# Altium PCB esp_altimeter_evo2.PcbDoc
Units mm, origin at the board's own origin, x right, y up, seen from the top; angles counter-clockwise.
Board outline 19 x 28 mm, 2 copper layers (Top Layer, Bottom Layer); 32 components, 22 nets, 98 pads, 20 vias.
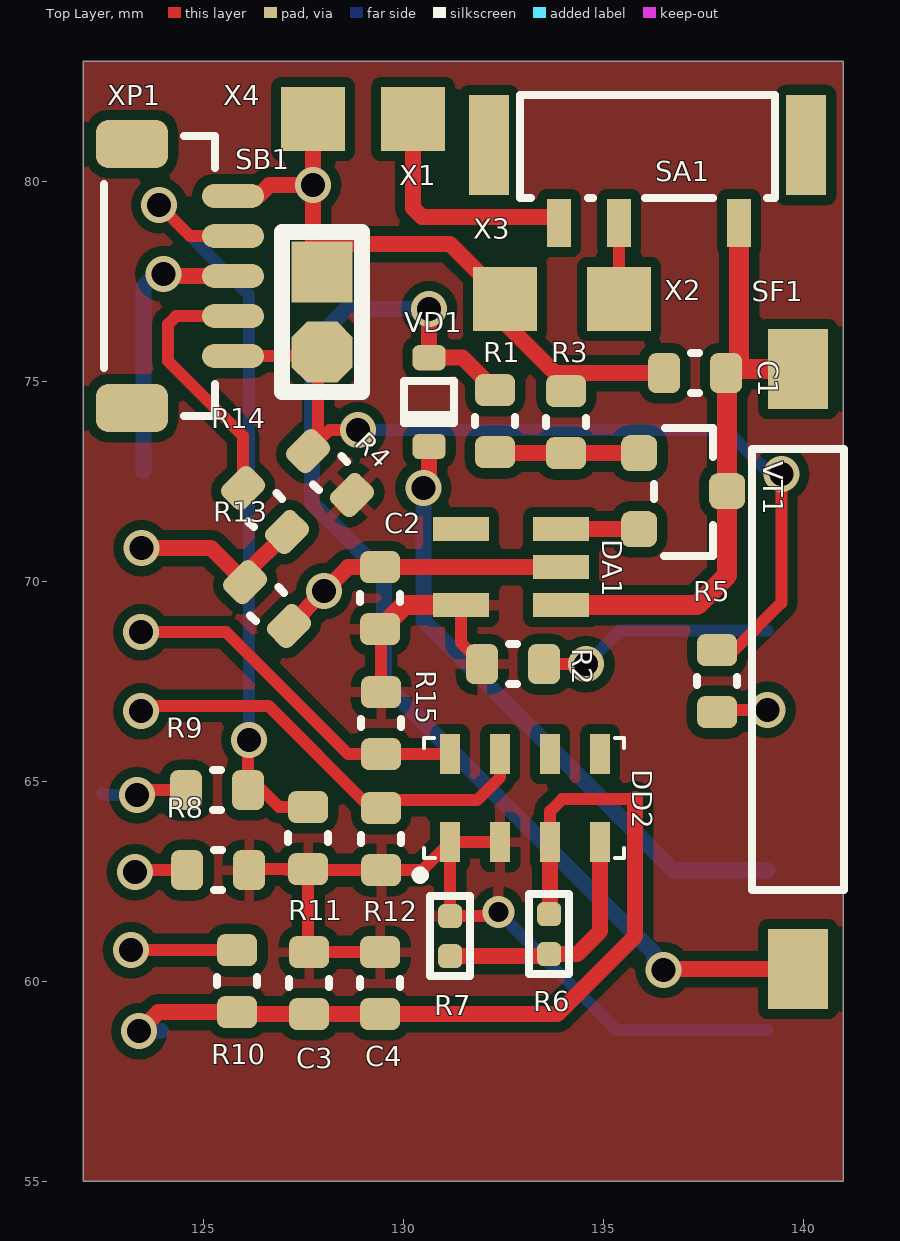
[diagram p0: Top Layer view]
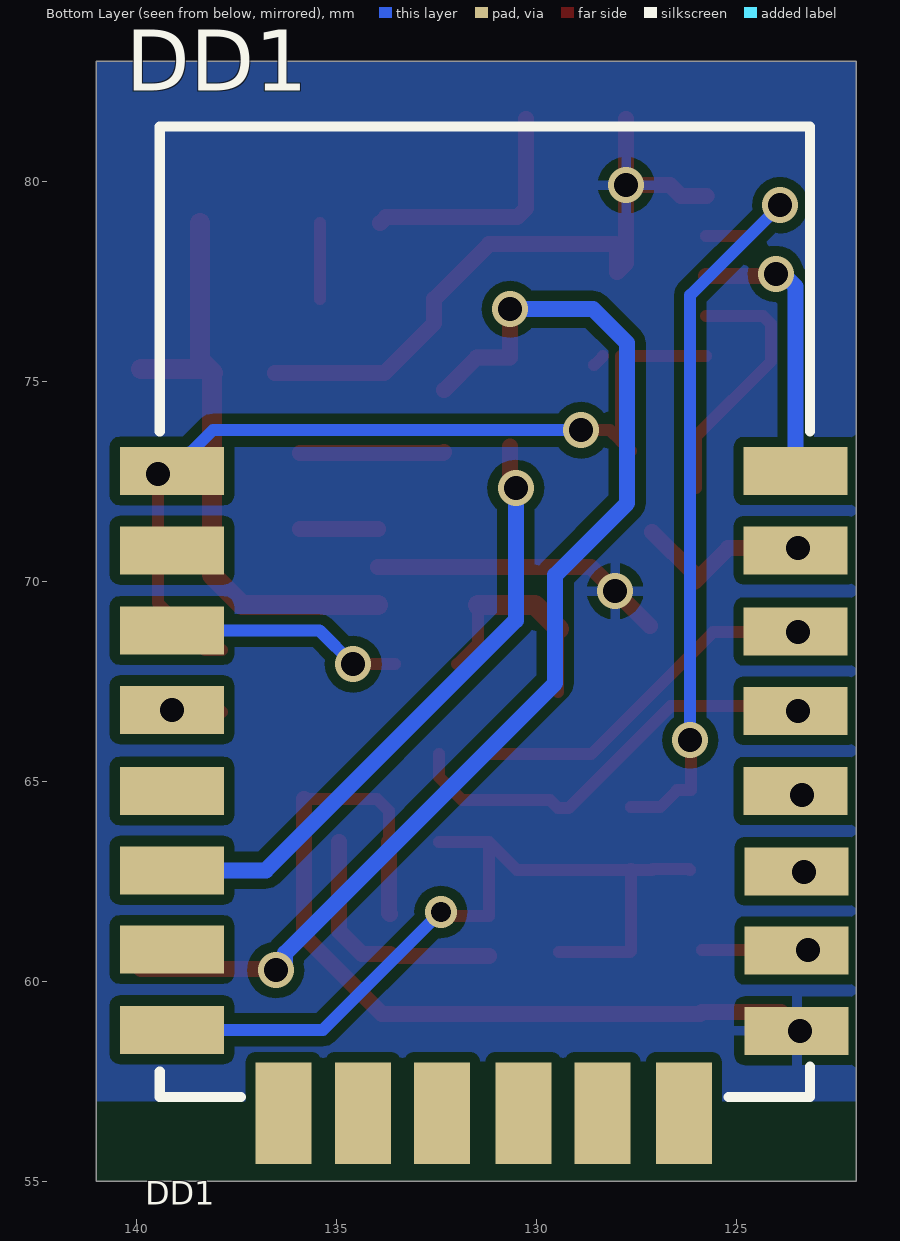
[diagram p1: Bottom Layer view, seen from below]
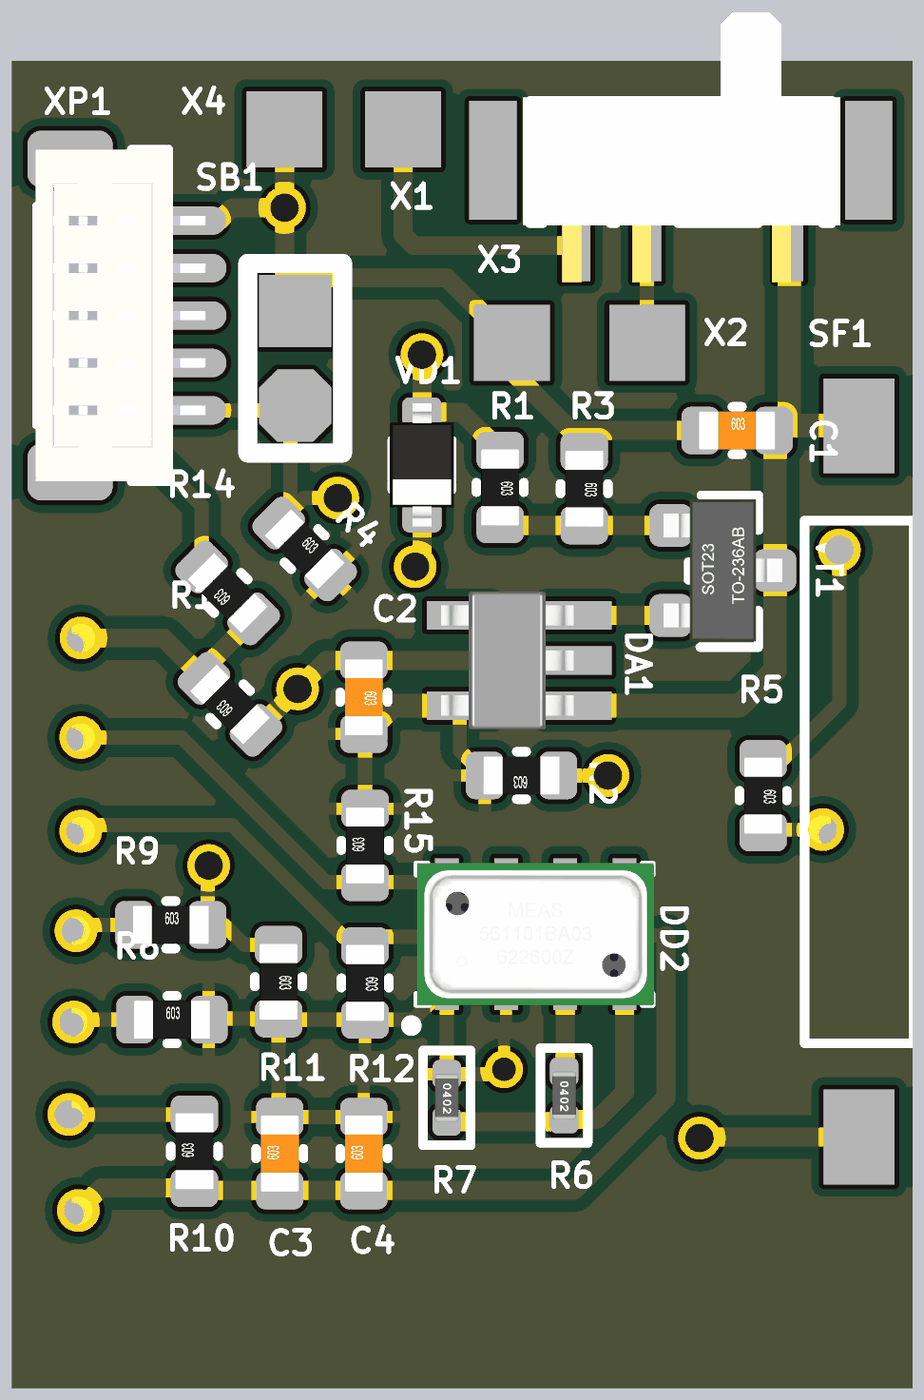
[diagram p2: 3D render of the assembled board from above, using the file's embedded part models]

## Layer stack, top to bottom
Top Solder: solder mask 0.0102, Solder Resist, Dk 3.5
Top Layer: signal copper 0.0356
Dielectric 1: dielectric 0.32, FR-4, Dk 4.8
Bottom Layer: signal copper 0.0356
Bottom Solder: solder mask 0.0102, Solder Resist, Dk 3.5

## Board outline
122,55 122,83 141,83 141,55

## Design rules (kind name [scope] priority, off if disabled: settings)
Clearance [All] p1: gap=0.254 ignorepadtopadclearanceinfootprint=FALSE except(0: Arc-Hole Track-Hole SMDPad-Hole THPad-Hole Via-Hole Fill-Hole Poly-Hole Region-Hole Text-Hole)
PolygonConnect [All] p1: connectstyle=Relief reliefconductorwidth=0.254 reliefentries=4 polygonreliefangle="90 Angle" airgapwidth=0.254
RoutingVias [All] p1: holewidth=0.6 width=0.9 viastyle="Through Hole" minholewidth=0.3 minwidth=0.6 maxholewidth=1.5 maxwidth=2.5
SolderMaskExpansion [All] p1: expansion=0.102
Width [All] p1: maxlimit=2.54 minlimit=0.254 preferedwidth=0.5
30 further rules are at their usual default settings.

## Components (designator, comment, footprint, x,y, rotation, side; value= is the part's Value field where it differs from the comment)
C1 "Cap EIA 0603" "CAP EIA 0603" 137.3,75.2 r0 top value=1uF
C2 "Cap EIA 0603" "CAP EIA 0603" 129.425,69.575 r270 top value=1uF
C3 "Cap EIA 0603" "CAP EIA 0603" 127.65,59.95 r90 top value=0.1uF
C4 "Cap EIA 0603" "CAP EIA 0603" 129.425,59.95 r90 top value=100nF
DA1 "LD39015" SOT23-5L 132.45,70.35 r270 top
DD1 "ESP8266 ESP-12E-RU" "ESP8266 ESP-12-E" 122.52,56.344 r180 bottom
DD2 "MS5611" MS5611 133.025,64.575 r90 top
R1 "Res EIA 0603" "RES EIA 0603" 132.3,74 r270 top value=1k
R2 "Res EIA 0603" "RES EIA 0603" 132.75,67.925 r180 top value=10k
R3 "Res EIA 0603" "RES EIA 0603" 134.075,73.975 r270 top value=10k
R4 "Res EIA 0603" "RES EIA 0603" 128.175,72.7 r315 top value=10k
R5 "Res EIA 0603" "RES EIA 0603" 137.85,67.5 r270 top value=470
R6 "Res EIA 0402" "RES EIA 0402" 133.65,61.175 r270 top value=0
R7 "Res EIA 0402" "RES EIA 0402" 131.175,61.125 r270 top value=0
R8 "Res EIA 0603" "RES EIA 0603" 125.375,62.775 r0 top value=10k
R9 "Res EIA 0603" "RES EIA 0603" 125.35,64.775 r0 top value=10k
R10 "Res EIA 0603" "RES EIA 0603" 125.85,60 r90 top value=10k
R11 "Res EIA 0603" "RES EIA 0603" 127.625,63.575 r270 top value=10k
R12 "Res EIA 0603" "RES EIA 0603" 129.45,63.55 r270 top value=10k
R13 "Res EIA 0603" "RES EIA 0603" 126.6,69.425 r135 top value=22k
R14 "Res EIA 0603" "RES EIA 0603" 126.55,71.775 r135 top value=10k
R15 "Res EIA 0603" "RES EIA 0603" 129.45,66.45 r90 top value=10k
SA1 "IS-1290" IS-1290F 136.175,80.85 r180 top
SB1 "RESET" SB_Pad 127.975,76.725 r270 top
SF1 "MK23-35-B-2" MK23-35-B-2 139.875,67.8 r270 top value="Open Reed Magnit Sensors"
VD1 "BAT54HT1G" SOD-323 130.65,74.475 r90 top value="SCHOTTKY BARRIER DIOD 0.2 AMPERES, 30 VOLTS"
VT1 "IRLML2402PbF" sot23 137,72.25 r270 top value=MOSFET;Канал:N;-30В
X1 "Charger_+" Surface_Pad 130.25,81.55 r0 top
X2 "Battery+" Surface_Pad 135.4,77.05 r0 top
X3 "BatteryGND" Surface_Pad 132.55,77.05 r0 top
X4 "Charger_GND" Surface_Pad 127.75,81.55 r0 top
XP1 "BM05B-SRSS-TB" BM05B-SRSS-TB 124.025,77.625 r90 top value="Разъем штыревой 5-и контактный угловой"

## Footprints (in the part's own frame and the unit in brackets; to place one, negate y for a bottom-side part, rotate by r counter-clockwise, add the part's x,y. Pads: shape width x height; smd on the part's side, far side on the other; paste and mask are expansions set on the pad)
BM05B-SRSS-TB [mm]
  rrect50% 1.2x1.8 smd: 0(-3.3,0.8) 0(3.3,0.8)
  oval 0.6x1.55 smd: 1(-2,-1.725) 2(-1,-1.725) 3(0,-1.725) 4(1,-1.725) 5(2,-1.72)
  silkscreen extent -3.5,-1.28 3.5,1.5, body extent -3.5,-2.07 3.5,1.53, height 4.25
"CAP EIA 0603" [mm] "Chip Resistor, 2-Leads, Body 1.57x0.85mm, IPC Medium Density"
  rrect50% 0.8x1 smd: 1(-0.775,0) 2(0.775,0)
  silkscreen extent -0.1,-0.5 0.1,0.5, body extent -0.8,-0.4 0.8,0.4, height 0.3
"ESP8266 ESP-12-E" [mil] "ESP8266 ESP-12-E"
  rect 102.36x47.24 smd: 1(-653,646) 2(-653,568) 3(-653,489) 4(-653,411) 5(-653,331) 6(-653,253) 7(-653,175) 8(-653,96) 15(-38,95) 16(-38,174) 17(-38,252) 18(-39,331) 19(-39,410) 20(-39,488) 21(-39,568) 22(-39,646)
  rect 55x100 smd: 9(-543,14) 10(-465,14) 11(-387,14) 12(-307,14) 13(-229,14) 14(-149,14)
  silkscreen extent -665,30 -25,985, body extent -660,32 -29,977, height 104
IS-1290F [mm]
  rect 1x2.5 smd: 0(-3.9,-0.05) 0(4.025,-0.05)
  rect 0.6x1.2 smd: 1(-2.225,1.9) 2(0.775,1.9) 3(2.275,1.9)
  silkscreen extent -3.13,-1.3 3.25,1.28, body extent -3.3,-3.18 3.4,2.53, height 1.42
MK23-35-B-2 [mm] "Reed Sensors"
  rect 2x1.5 smd: 1(-7.5,0) 2(7.5,0)
  silkscreen extent -5.5,-1.15 5.53,1.15
MS5611 [mm]
  rect 1x0.5 smd: 1(-1.1,1.85) 2(-1.1,0.6) 3(-1.1,-0.65) 4(-1.1,-1.9) 5(1.1,-1.9) 6(1.1,-0.65) 7(1.1,0.6) 8(1.1,1.85)
  silkscreen extent -2.02,-2.5 1.5,2.69, body extent -1.5,-2.52 1.5,2.48, height 1.02
"RES EIA 0402" [mm] "Chip Resistor, 2-Leads, Body 1,00x0,50mm, IPC Medium Density"
  rrect50% 0.6x0.6 smd: 1(-0.5,0) 2(0.5,0)
  silkscreen extent -1,-0.5 1,0.5, body extent -0.51,-0.25 0.51,0.25, height 0.51
"RES EIA 0603" [mm] "Chip Resistor, 2-Leads, Body 1.57x0.85mm, IPC Medium Density"
  rrect50% 0.8x1 smd: 1(-0.775,0) 2(0.775,0)
  silkscreen extent -0.1,-0.5 0.1,0.5, body extent -0.8,-0.4 0.8,0.4, height 0.3
SB_Pad [mil]
  rect 60x60 smd: 1(-39.37,0)
  oct 60x60 smd: 2(39.37,0)
  silkscreen extent -79,-39 79,39
SOD-323 [mm] "Diod"
  rrect50% 0.63x0.83 smd: 1(-1.11,0) 2(1.11,0)
  silkscreen extent -0.53,-0.63 0.53,0.63, body extent -1.3,-0.67 1.3,0.68, height 1.1
sot23 [mm]
  rrect50% 0.9x0.9 smd: 1(-0.95,-1.1) 2(0.95,-1.1) 3(0,1.1)
  silkscreen extent -1.58,-0.72 1.62,0.75, body extent -1.5,-1.25 1.5,1.25, height 1.09
SOT23-5L [mm]
  rect 0.6x1.4 smd: 1(0.95,1.5) 2(0,1.5) 3(-0.95,1.5) 4(-0.95,-1) 5(0.95,-1)
  body extent -1.45,-1.4 1.45,1.4, height 1.07
Surface_Pad [mm]
  rect 1.6x1.6 smd: 1(0,0)

## Part data
DD1: Manufacturer=Espressif, Documentation=https://www.espressif.com/sites/default/files/documentation/0a-esp8266ex_datasheet_en.pdf, Group=Microcontrollers, Name=ESP8266-12E, Price=1,7$
SB1: library part SB_Pad
SF1: Manufacturer="MEDER electronic", Group=Переключатели, Name=MK23-35-B-2, Supplier="ООО Компел"
VD1: "SCHOTTKY BARRIER DIOD 0.2 AMPERES, 30 VOLTS", Manufacture="ON Semiconductor", Group=Диоды, Name=BAT54HT1G, Supplier="ООО \"Компэл\""
VT1: "N-Channel HEXFET  Power MOSFET", Manufacturer="International Rectifier", Group=Транзисторы, Name=IRLML2402PbF, Supplier="ООО \"Торгэлектроника\""
X1 X2 X3 X4: library part Surface_Pad
XP1: "5-Pin Angle Connector", Manufacturer=JST, Group=Разъемы, Name=BM05B-SRSS-TB, Supplier="ООО\"Компэл\""
C1 C2 C3 C4: Group=Конденсаторы
R1 R2 R3 R4 R5 R6 R7 R8 R10 R11 R12 R13 R14 R15: Group=Резисторы
R9: Group=Резисторы, Name=BURN
SA1: Group=Переключатели, Name=IS-1290

## Via types
v1: diameter 0.9, hole 0.6, Top Layer to Bottom Layer, 19 vias
v2: diameter 0.8, hole 0.5, Top Layer to Bottom Layer, 1 vias

## Nets (pads, with @x,y where several pads share a name; then routed paths per layer and width w, separated by ;. In a path a pad name is that pad's centre, name@x,y a point inside that pad or via, vN(x,y) a via of type N, cw(c..) or ccw(c..) an arc to the next point about the centre after c; other vN are vias at no path point)
+3.3V: C2.2 C3.2 C4.2 DA1.5 DD1.8 DD2.1 DD2.2 R2.2 R4.2 R7.1 R8.2 R11.2 R12.2 R15.2 | length 27.1
  Top Layer w0.3: R8.2 126.175,62.8 127.075,62.8 127.1,62.775 R11.2@127.625,62.775 ; R11.2 R11.2@127.625,62.775 ; C4.2 C3.2 127.625,60.75 R11.2@127.625,62.775 ; C2.2 129.45,68.775 R15.2 ; DA1.5 131.45,68.45 R2.2 ; v2(132.381,61.728) 132.381,61.706 132.3,61.625 R7.1 DD2.1 ; DD2.2 DD2.1 ; R11.2@127.625,62.775 R12.2 130.475,62.775 DD2.1
  Top Layer w0.5: C2.2 130.025,69.4 DA1.5
  Bottom Layer w0.3: v2(132.381,61.728) 135.327,58.783 DD1.8
Ardu_RX: R14.2 XP1.2 | length 6.6
  Top Layer w0.3: XP1.2 124.325,76.625 124.125,76.425 124.125,75.5 126.002,73.623 R14.2
Ardu_TX: DD1.22 XP1.3 | length 7
  Top Layer w0.4: v1(124.006,77.679) 124.006,77.631 124.012,77.625 XP1.3
  Bottom Layer w0.4: DD1.22 123.511,77.361 123.829,77.679 v1(124.006,77.679)
DTR: R9.2 R11.1 XP1.4 | length 19.4
  Top Layer w0.3: v1(123.9,79.4) 124.675,78.625 XP1.4 ; v1(126.15,66.025) 126.125,66 R9.2 126.475,64.775 126.9,64.35 R11.1
  Bottom Layer w0.3: v1(123.9,79.4) 126.15,77.15 v1(126.15,66.025)
ESP_ON/OFF: DD1.6 VD1.1 | length 15.6
  Top Layer w0.4: v1(130.506,72.329) 130.5,72.335 130.65,72.485 VD1.1
  Bottom Layer w0.4: v1(130.506,72.329) 130.506,69.019 136.754,62.771 DD1.6
GND: C1.1 C2.1 C3.1 C4.1 DA1.2 DD1.15 DD2.3 R3.1 R6.1 R10.1 R13.1 SB1.1 X3.1 X4.1 XP1.5 | length 46.6
  Top Layer w0.3: DD2.3 133.675,64.25 133.975,64.55 135.8,64.55
  Top Layer w0.4: v1(123.4,58.75) 123.875,59.225 R10.1 125.9,59.175 C3.1 C4.1 133.85,59.175 135.8,61.125 135.8,64.55 ; XP1.5 126.375,79.625 126.65,79.9 v1(127.75,79.9) ; R13.1 128.021,69.75 v1(128.025,69.75) 128.625,70.35 C2.1 DA1.2 ; X4.1 v1(127.75,79.9) ; R6.1 133.675,61.7 DD2.3 ; C1.1 133.8,75.2 132.55,76.45 X3.1 131.175,78.425 128.025,78.425 127.975,78.375 SB1.1 127.75,77.95 v1(127.75,79.9)
  Bottom Layer w0.4: v1(123.4,58.75) DD1.15@123.95,58.75
NetC1_2: C1.2 DA1.1 SA1.1 SF1.1 VT1.3 | length 15.1
  Top Layer w0.5: DA1.1 137.35,69.4 138.1,70.15 VT1.3 138.1,75.175 C1.2 C1.2@138.175,75.3 ; SA1.1 138.4,75.525 C1.2@138.175,75.3 ; SF1.1 C1.2@138.175,75.3
NetDA1_3: DA1.3 VT1.2 | length 1.9
  Top Layer w0.4: DA1.3 VT1.2
NetDD1_3: DD1.3 R2.1 | length 5.9
  Top Layer w0.3: R2.1 v1(134.575,67.925)
  Bottom Layer w0.3: v1(134.575,67.925) 135.415,68.765 DD1.3
NetDD1_4: DD1.4 R5.2 | length 1.3
  Top Layer w0.3: R5.2 137.909,66.784 v1(139.106,66.784)
NetDD1_16: DD1.16 R10.2 | length 2.7
  Top Layer w0.3: v1(123.2,60.775) R10.2
  Bottom Layer w0.3: DD1.16@123.15,60.825 v1(123.2,60.775)
NetDD1_17: DD1.17 R8.1 | length 1.3
  Top Layer w0.3: v1(123.3,62.725) 123.35,62.775 R8.1
NetDD1_18: DD1.18 R9.1 | length 2.4
  Top Layer w0.3: v1(123.35,64.65) 123.225,64.775 R9.1
  Bottom Layer w0.3: DD1.18@122.475,64.7 122.525,64.65 v1(123.35,64.65)
NetDD1_21: DD1.21 R13.2 R14.1 | length 4.7
  Top Layer w0.4: v1(123.457,70.825) 125.2,70.825 R13.2 126.052,70.181 R14.1
  Bottom Layer w0.4: v1(123.457,70.825) DD1.21
NetDD2_4: DD2.4 R6.2 R7.2 | length 6.2
  Top Layer w0.4: R7.2 133.6,60.625 R6.2 134.35,60.675 134.925,61.25 DD2.4
NetR1_1: R1.1 SF1.2 VD1.2 | length 29.1
  Top Layer w0.4: v1(130.65,76.8) VD1.2 131.49,75.585 R1.1 ; v1(136.507,60.278) 136.529,60.3 SF1.2
  Bottom Layer w0.4: v1(130.65,76.8) 128.575,76.8 127.725,75.95 127.725,71.95 129.525,70.15 129.525,67.45 136.275,60.7 136.275,60.456 v1@136.453,60.278
NetR1_2: R1.2 R3.2 VT1.1 | length 3.6
  Top Layer w0.4: R1.2 132.325,73.2 R3.2 VT1.1
NetSA1_2: SA1.2 X2.1 | length 1.9
  Top Layer w0.3: X2.1 SA1.2
NetSA1_3: SA1.3 X1.1 | length 6
  Top Layer w0.4: X1.1 130.25,79.325 130.475,79.1 133.75,79.1 SA1.3
RTS: DD1.1 R4.1 R5.1 SB1.2 XP1.1 | length 22
  Top Layer w0.3: XP1.1 127.875,75.625 R4.1@127.875,73.496 ; R4.1 R4.1@127.875,73.496 ; SB1.2@128.325,75.625 SB1.2@128.55,75.4 ; v1(128.875,73.775) 128.154,73.775 R4.1@127.875,73.496 ; R5.1 138.275,68.275 139.457,69.457 v1(139.457,72.679)
  Bottom Layer w0.3: v1(128.875,73.775) 138.084,73.775 DD1.1
SCL: DD1.20 DD2.8 R15.1 | length 9
  Top Layer w0.3: v1(123.45,68.725) 125.575,68.725 128.625,65.675 R15.1 DD2.8
SDA: DD1.19 DD2.7 R12.1 | length 11
  Top Layer w0.3: v1(123.45,66.75) 123.579,66.879 126.638,66.879 129.192,64.325 R12.1 129.65,64.525 131.85,64.525 132.425,65.1 DD2.7
pads on no net: DA1.4 DD1.2 DD1.5 DD1.7 DD1.9 DD1.10 DD1.11 DD1.12 DD1.13 DD1.14 DD2.5 DD2.6 SA1.0 XP1.0

## Polygon pours and split planes (outlines as drawn)
GND on Bottom Layer "Top Layer-+3.3V" (solid, pour order 2): 122,57 141,57 141,83 122,83
+3.3V on Top Layer "Top Layer-+3.3V" (solid, pour order 4): 122,55 141,55 141,83 122,83

## Silkscreen, mask and mechanical layers (free items; w line width, h text height)
Mechanical 1:
  the board outline again, w0.4

## Text inside footprints (layer, text, board x,y; h text height)
DD1: Mechanical 13 "ANTENNA AREA" at 139.105,80.743 h0.25; Mechanical 13 "CUTOUT POLYGON" at 139.105,80.235 h0.25